# Altium PCB PCB1.PcbDoc
Units mil, origin at the board's own origin, x right, y up, seen from the top; angles counter-clockwise.
Board outline 2125 x 3375 mil, 4 copper layers (Top Layer, Layer 1, Layer 2, Bottom Layer), stack 60.63 mil thick; 22 components, 13 nets, 85 pads, 21 vias.
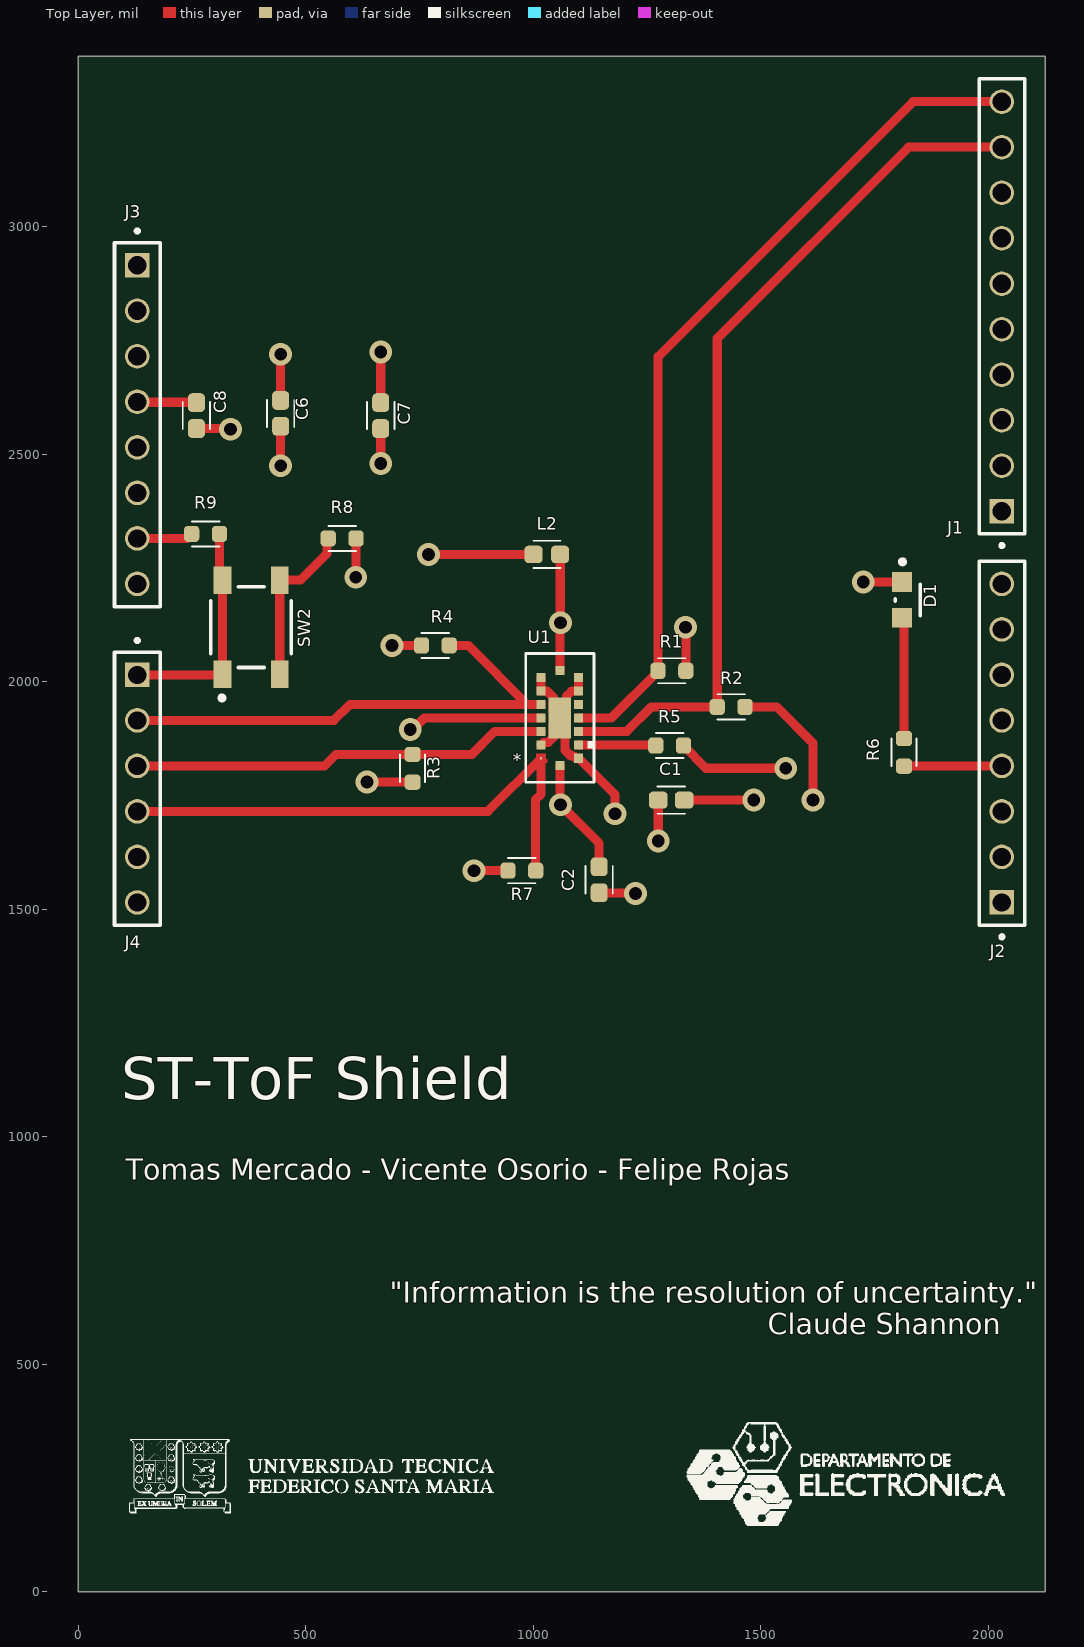
[diagram p0: Top Layer view]
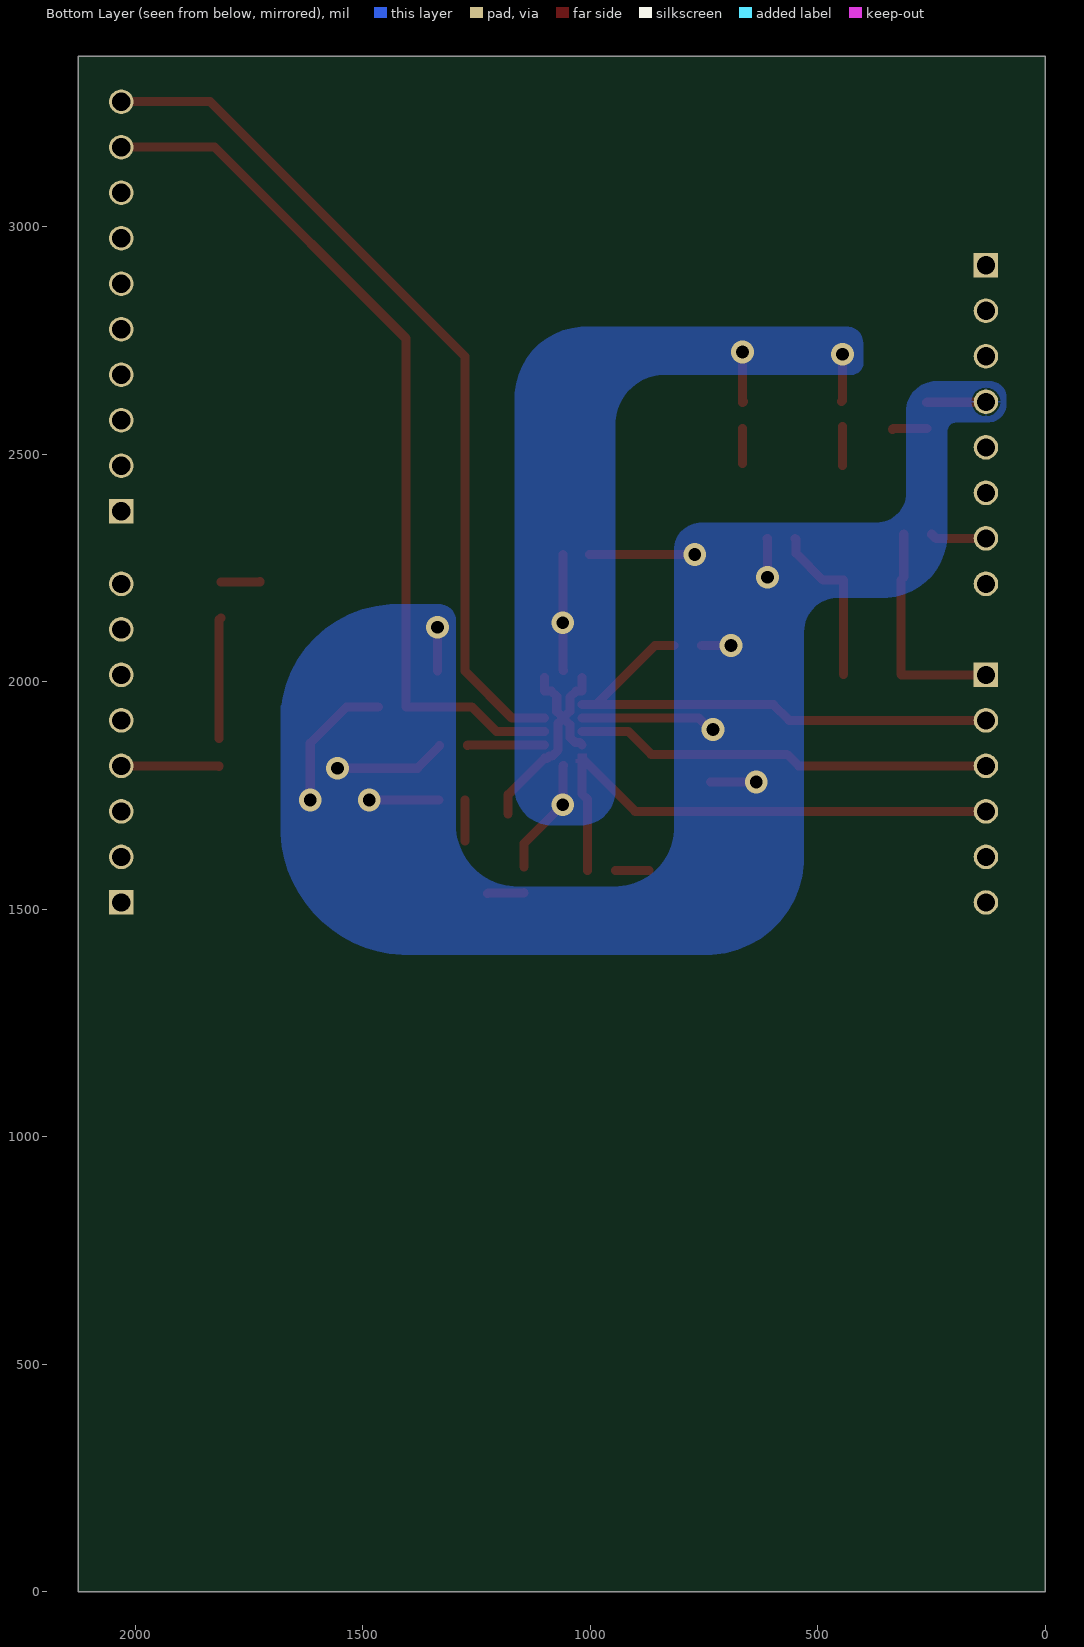
[diagram p1: Bottom Layer view, seen from below]
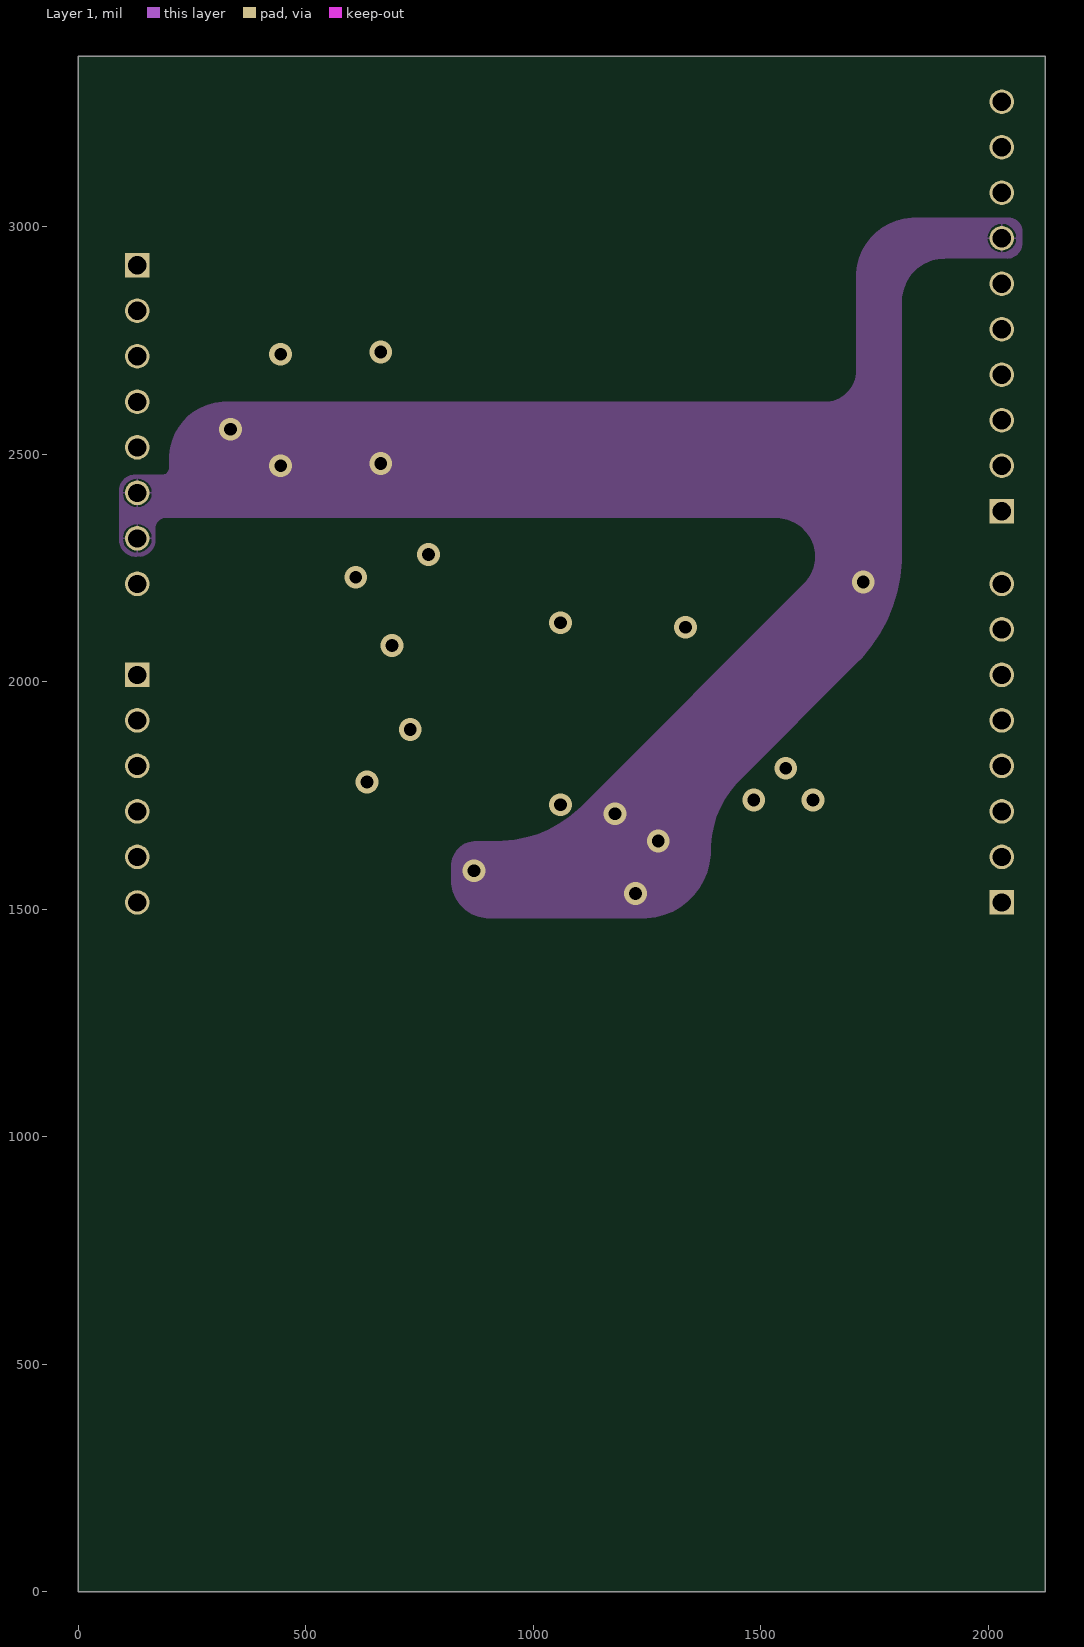
[diagram p2: Layer 1]
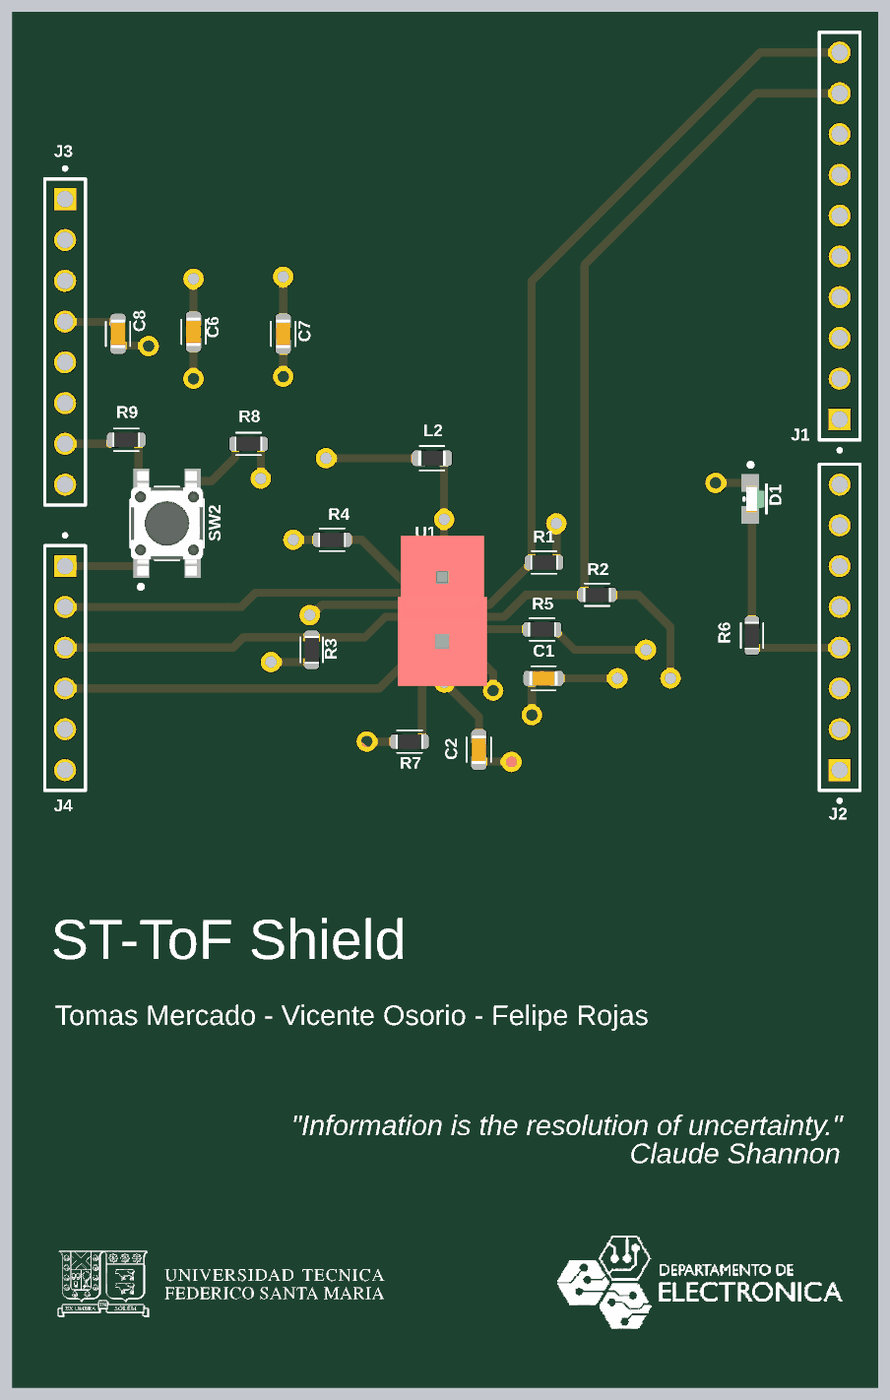
[diagram p3: 3D render of the assembled board from above, using the file's embedded part models]

## Layer stack, top to bottom
Top Solder: solder mask 0.4, Solder Resist, Dk 3.5
Top Layer: signal copper 1.378
Dielectric 2: prepreg 7.874, PP-006, Dk 4.2
Layer 1: signal copper 1.378
Dielectric 1: dielectric 39.37, FR-4, Dk 4.2
Layer 2: signal copper 1.378
Dielectric 3: prepreg 7.874, PP-006, Dk 4.2
Bottom Layer: signal copper 1.378
Bottom Solder: solder mask 0.4, Solder Resist, Dk 3.5

## Board outline
0,0 2125,0 2125,3375 0,3375

## Design rules (kind name [scope] priority, off if disabled: settings)
BoardOutlineClearance [All] p1: gap=7.87 ignorepadtopadclearanceinfootprint=FALSE
Clearance [All] p1: gap=4 ignorepadtopadclearanceinfootprint=TRUE except(5: Arc-Via Track-Via SMDPad-Via THPad-Via Via-Via Via-Fill Via-Poly Via-Region Via-Text; 10: Arc-Hole Track-Hole SMDPad-Hole THPad-Hole Via-Hole Fill-Hole Poly-Hole Region-Hole Text-Hole)
ComponentClearance [All] p1: gap=4 collisioncheckmode=3 verticalgap=4 showdistances=TRUE
DiffPairsRouting [All] p1: maxlimit=4 minlimit=4 mostfreqgap=4 toplayer_minwidth=4 toplayer_maxwidth=71497.94 toplayer_prefwidth=4 midlayer1_minwidth=4 midlayer1_maxwidth=71497.94 midlayer1_prefwidth=4 midlayer2_minwidth=4 midlayer2_maxwidth=71497.94 midlayer2_prefwidth=4 bottomlayer_minwidth=4 bottomlayer_maxwidth=71497.94 bottomlayer_prefwidth=4 maxuncoupledlength=500
Height [All] p1: minheight=0 maxheight=71497.94 prefheight=500
HoleSize [All] p1: absolutevalues=TRUE maxlimit=248.03 minlimit=7.87 maxpercent=80.000 minpercent=20.000
HoleToHoleClearance [All] p1: gap=10 allowstackedmicrovias=FALSE
MinimumAnnularRing [All] p1: minimumring=6
MinimumSolderMaskSliver [All] p1: minsoldermaskwidth=6
PlaneClearance [All] p1: clearance=4
PlaneConnect PlaneConnectPowerPads [InPadClass('PowerPads')] p1: planeconnectstyle=Direct reliefexpansion=20 reliefentries=4 reliefconductorwidth=10 reliefairgap=10
PlaneConnect [All] p2: pad.planeconnectstyle=Relief pad.reliefexpansion=11.81 pad.reliefentries=4 pad.reliefconductorwidth=4 pad.reliefairgap=4 via.planeconnectstyle=Direct via.reliefexpansion=11.81 via.reliefentries=4 via.reliefconductorwidth=5 via.reliefairgap=5
PolygonConnect PolygonConnectPowerPads [All vs (InPadClass('PowerPads'))] p1: connectstyle=Direct reliefconductorwidth=10 reliefentries=4 polygonreliefangle="90 Angle" airgapwidth=10
PolygonConnect [All] p2: thpad.connectstyle=Relief thpad.reliefconductorwidth=4 thpad.reliefentries=4 thpad.polygonreliefangle="90 Angle" thpad.airgapwidth=4 smdpad.connectstyle=Relief smdpad.reliefconductorwidth=4 smdpad.reliefentries=4 smdpad.polygonreliefangle="90 Angle" smdpad.airgapwidth=4 via.connectstyle=Direct via.reliefconductorwidth=5 via.reliefentries=4 via.polygonreliefangle="90 Angle" via.airgapwidth=5
RoutingVias [All] p1: holewidth=7.87 width=17.72 viastyle="Through Hole" minholewidth=7.87 minwidth=17.72 maxholewidth=248.03 maxwidth=257.87
SilkToSilkClearance [All] p1: silktosilkclearance=5
SilkToSolderMaskClearance [IsPad] p1: minsilkscreentomaskgap=5 clearancetoexposedcopper=TRUE
SolderMaskExpansion [All] p1: expansion=2 istentingtop=FALSE
UnRoutedNet [All] p1: checkbadconnections=TRUE
Width Power_20mil [All] p1: maxlimit=1000 minlimit=20 preferedwidth=20 minimp=50.000000 maximp=50.000000 favimp=50.000000
Width Power_12mil [All] p2: maxlimit=1000 minlimit=12 preferedwidth=12 minimp=50.000000 maximp=50.000000 favimp=50.000000
Width Width_10mil [All] p3: maxlimit=1000 minlimit=10 preferedwidth=10 minimp=50.000000 maximp=50.000000 favimp=50.000000
Width Width_6mil [All] p4: maxlimit=1000 minlimit=6 preferedwidth=6 minimp=50.000000 maximp=50.000000 favimp=50.000000
Width Width_4mil [All] p5: maxlimit=1000 minlimit=4 preferedwidth=4 minimp=50.000000 maximp=50.000000 favimp=50.000000
19 further rules are at their usual default settings.

## Components (designator, comment, footprint, x,y, rotation, side; value= is the part's Value field where it differs from the comment)
C1 "100nF" "C0603 - MURATA" 1303.54,1740 r0 top
C2 "4.7µF" "C0603 - MURATA" 1145,1565 r90 top
C6 "4.7µF" "C0603 - MURATA" 445,2590 r90 top
C7 "100nF" "C0603 - MURATA" 665,2585 r90 top
C8 "100nF" "C0603 - MURATA" 260,2585 r90 top
D1 "LTST-S270KGKT" FP-LTST-S270KGKT-MFG 1820,2180 r270 top
J1 "TSW-110-14-G-S-LL" SAMTEC_TSW-110-14-G-S-LL 2030,2375 r90 top locked
J2 "TSW-108-14-G-S-LL" SAMTEC_TSW-108-14-G-S-LL 2030,1515.16 r90 top locked
J3 "TSW-108-14-G-S-LL" SAMTEC_TSW-108-14-G-S-LL 130,2915.16 r270 top locked (schematic designator J5)
J4 "TSW-106-14-G-S-LL" SAMTEC_TSW-106-14-G-S-LL 130,2015.16 r270 top locked (schematic designator J6)
L2 "BLM18KG121TZ1D" BLM18KG121TZ1D 1030,2280 r0 top
R1 "2.2kΩ" "R0603 - YAGEO" 1305,2024.33 r0 top
R2 "2.2kΩ" "R0603 - YAGEO" 1435,1945 r0 top
R3 "47kΩ" "R0603 - YAGEO" 735,1810 r270 top
R4 "47kΩ" "R0603 - YAGEO" 785,2080 r180 top
R5 "47kΩ" "R0603 - YAGEO" 1300,1860 r0 top
R6 "270Ω" "R0603 - YAGEO" 1815,1845 r270 top
R7 "47kΩ" "R0603 - YAGEO" 975,1585 r0 top
R8 "10Ω" "R0603 - YAGEO" 580,2315 r180 top
R9 "10kΩ" "R0603 - YAGEO" 280,2325 r0 top
SW2 "PTS647SK38SMTR2LFS" FP-PTS647SK38SMTR2LFS-MFG 380,2120 r90 top
U1 "VL53L7CXV0GC/1" VL53L7CXV0GC1 1058.66,1920.47 r0 top

## Footprints (in the part's own frame and the unit in brackets; to place one, negate y for a bottom-side part, rotate by r counter-clockwise, add the part's x,y. Pads: shape width x height; smd on the part's side, far side on the other; paste and mask are expansions set on the pad)
BLM18KG121TZ1D [mm] "Chip Inductor, 2-Leads, Body 1,60x0,80mm, IPC Medium Density"
  rrect50% 1.02x0.98 smd: 1(-0.74,0) 2(0.74,0)
  silkscreen extent -0.76,-0.76 0.76,0.76, body extent -0.87,-0.48 0.87,0.48, height 0.75
"C0603 - MURATA" [mm]
  rrect50% 1.05x0.95 smd: 1(-0.725,0) 2(0.725,0)
  silkscreen extent -0.76,-0.76 0.76,0.76, body extent -0.9,-0.45 0.9,0.45, height 0.9
FP-LTST-S270KGKT-MFG [mm]
  rect 1.1x1.1 smd paste+0 mask+0: 1(-1,-0.235) 2(1,-0.235)
  silkscreen extent -2.25,-0.63 0.87,0.77, body extent -1.65,-0.88 1.65,0.72, height 0.25
FP-PTS647SK38SMTR2LFS-MFG [mm]
  rect 1.55x1 smd paste+0 mask+0: 1(-2.625,1.6) 2(2.625,1.6) 3(-2.625,-1.6) 4(2.625,-1.6)
  silkscreen extent -4.07,-2.25 2.25,2.25, body extent -3.5,-2.35 3.5,2.35, height 0.25
"R0603 - YAGEO" [mm]
  rrect50% 0.85x0.9 smd: 1(-0.775,0) 2(0.775,0)
  silkscreen extent -0.77,-0.7 0.77,0.7, body extent -0.85,-0.45 0.85,0.45, height 0.55
SAMTEC_TSW-106-14-G-S-LL [mm]
  rect 1.37x1.37 hole 1.02: 01(0,0)
  round 1.37 hole 1.02: 02(2.54,0) 03(5.08,0) 04(7.62,0) 05(10.16,0) 06(12.7,0)
  silkscreen extent -2.02,-1.27 13.97,1.27
SAMTEC_TSW-108-14-G-S-LL [mm]
  rect 1.37x1.37 hole 1.02: 01(0,0)
  round 1.37 hole 1.02: 02(2.54,0) 03(5.08,0) 04(7.62,0) 05(10.16,0) 06(12.7,0) 07(15.24,0) 08(17.78,0)
  silkscreen extent -2.02,-1.27 19.05,1.27
SAMTEC_TSW-110-14-G-S-LL [mm]
  rect 1.37x1.37 hole 1.02: 01(0,0)
  round 1.37 hole 1.02: 02(2.54,0) 03(5.08,0) 04(7.62,0) 05(10.16,0) 06(12.7,0) 07(15.24,0) 08(17.78,0) 09(20.32,0) 10(22.86,0)
  silkscreen extent -2.02,-1.27 24.13,1.27
VL53L7CXV0GC1 [mil]
  rect 5x5 smd paste-2.5 mask-2.5: A1(-41.34,-88.58)
  rect 20x20 smd paste+0 mask+0: A2(-41.34,-59.06) A3(-41.34,-29.53) A4(-41.34,0) A5(-41.34,29.53) A6(-41.34,59.06) A7(-41.34,88.58) B1(0,-104.33) B7(0,104.33) C1(41.34,-88.58) C2(41.34,-59.06) C3(41.34,-29.53) C4(41.34,0) C5(41.34,29.53) C6(41.34,59.06) C7(41.34,88.58)
  rect 49x91 smd paste-45.5 mask-45.5: B4(0,0)
  Top Layer region: -31.34,-78.58 -51.34,-78.58 -51.34,-98.58 -27.34,-98.58 -27.34,-90.58 -31.34,-90.58
  silkscreen extent -75,-142 75,142, body extent -113,-199 106,170, height 179

## Part data
C1 C7 C8: library part "CAP - GENERIC", "Ceramic Capacitor, Ceramic, 16V, 10% +Tol, 10% -Tol, X7R, 15% TC, 0.1uF, Surface Mount, 0603", .Case/Package=0603, .Voltage Rating (DC)=16V, Case Code (Metric)=1608, Dielectric=X7R, Dielectric Material=Ceramic, Manufacturer=Murata, Manufacturer Lifecycle Status="IN PRODUCTION", Manufacturer Part Number=GCJ188R71C104KA01D, Max Operating Temperature=125°C, Min Operating Temperature=-55°C, Ratings=AEC-Q200, Supplier Part Number 1=81-GCJ188R71C104KA1D, Tolerance=10%, Capacitance=100nF, Case Code (Imperial)=0603, Case/Package=0603, Category="Ceramic Capacitors", ComponentLink1Description=https://datasheet.octopart.com:443/GCJ188R71C104KA01D-Murata-datasheet-141264586.pdf?src-supplier=Geoflip, ComponentLink1URL=https://datasheet.octopart.com:443/GCJ188R71C104KA01D-Murata-datasheet-141264586.pdf?src-supplier=Geoflip, ComponentLink2Description=https://datasheet.octopart.com:443/GCJ188R71C104KA01D-Murata-datasheet-140654670.pdf?src-supplier=Ciiva, ComponentLink2URL=https://datasheet.octopart.com:443/GCJ188R71C104KA01D-Murata-datasheet-140654670.pdf?src-supplier=Ciiva, ComponentLink3Description=https://datasheet.octopart.com:443/GCJ188R71C104KA01D-Murata-datasheet-138714343.pdf?src-supplier=Ciiva, ComponentLink3URL=https://datasheet.octopart.com:443/GCJ188R71C104KA01D-Murata-datasheet-138714343.pdf?src-supplier=Ciiva, ComponentLink4Description=https://datasheet.octopart.com:443/GCJ188R71C104KA01D-Murata-datasheet-165611796.pdf?src-supplier=TME, ComponentLink4URL=https://datasheet.octopart.com:443/GCJ188R71C104KA01D-Murata-datasheet-165611796.pdf?src-supplier=TME, ComponentLink5Description=https://datasheet.octopart.com:443/GCJ188R71C104KA01D-Murata-datasheet-118179445.pdf?src-supplier=LCSC, ComponentLink5URL=https://datasheet.octopart.com:443/GCJ188R71C104KA01D-Murata-datasheet-118179445.pdf?src-supplier=LCSC, ComponentLink6Description=https://datasheet.octopart.com/GCJ188R71C104KA01D-Murata-datasheet-14405600.pdf, ComponentLink6URL=https://datasheet.octopart.com/GCJ188R71C104KA01D-Murata-datasheet-14405600.pdf, ComponentLink7Description=http://sigma.octopart.com:80/reach_statement/Murata-company-16.pdf?src-supplier=Compliance+Statements, ComponentLink7URL=http://sigma.octopart.com:80/reach_statement/Murata-company-16.pdf?src-supplier=Compliance+Statements, Depth=800µm, Features="Soft Termination", Height=800µm, Length=1.6mm, Lifecycle Status=Production, Material=Ceramic, Mount="Surface Mount", Number of Terminals=2, Pricing 1="1=0,16, 10=0,065, 50=0,065, 100=0,054, 1000=0,039, 10000=0,022 (USD)", Radiation Hardening=No, REACH SVHC=Yes, RoHS=Compliant, Schedule B="8532240020, 8532240020|8532240020|8532240020|8532240020|8532240020|8532240020|8532240020|8532240020|8532240020|8532240020|8532240020|8532240020|8532240020|8532240020|8532240020|8532240020|8532240020|8532240020|8532240020|8532240020|8532240020|8532240020|8532240020|85", Stock 1=83275, Supplier 1=Mouser, Termination=SMD/SMT, Voltage Rating=16V, Voltage Rating (DC)=16V, Width=800µm
C2 C6: library part "CAP - GENERIC", "GRJ Series 0603 6.3 V 4.7 uF ±10% X7S SMT Multilayer Ceramic Capacitor", .Case/Package=0603, .Voltage Rating (DC)=6.3V, Case Code (Metric)=1608, Dielectric=X7S, Dielectric Material=Ceramic, Manufacturer=Murata, Manufacturer Lifecycle Status="IN PRODUCTION", Manufacturer Part Number=GRJ188C70J475KE11D, Max Operating Temperature=125°C, Min Operating Temperature=-55°C, Supplier Part Number 1=81-GRJ188C70J475KE1D, Tolerance=10%, Capacitance=4.7µF, Case Code (Imperial)=0603, Case/Package=0603, Category="Ceramic Capacitors", ComponentLink1Description=https://datasheet.octopart.com:443/GRJ188C70J475KE11D-Murata-datasheet-165579666.pdf?src-supplier=TME, ComponentLink1URL=https://datasheet.octopart.com:443/GRJ188C70J475KE11D-Murata-datasheet-165579666.pdf?src-supplier=TME, ComponentLink2Description=https://datasheet.octopart.com:443/GRJ188C70J475KE11D-Murata-datasheet-140671071.pdf?src-supplier=Ciiva, ComponentLink2URL=https://datasheet.octopart.com:443/GRJ188C70J475KE11D-Murata-datasheet-140671071.pdf?src-supplier=Ciiva, ComponentLink3Description=https://datasheet.octopart.com:443/GRJ188C70J475KE11D-Murata-datasheet-140671041.pdf?src-supplier=Ciiva, ComponentLink3URL=https://datasheet.octopart.com:443/GRJ188C70J475KE11D-Murata-datasheet-140671041.pdf?src-supplier=Ciiva, ComponentLink4Description=https://datasheet.octopart.com:443/GRJ188C70J475KE11D-Murata-datasheet-138730632.pdf?src-supplier=Ciiva, ComponentLink4URL=https://datasheet.octopart.com:443/GRJ188C70J475KE11D-Murata-datasheet-138730632.pdf?src-supplier=Ciiva, ComponentLink5Description=https://datasheet.octopart.com:443/GRJ188C70J475KE11D-Murata-datasheet-82944415.pdf?src-supplier=Future+Electronics, ComponentLink5URL=https://datasheet.octopart.com:443/GRJ188C70J475KE11D-Murata-datasheet-82944415.pdf?src-supplier=Future+Electronics, ComponentLink6Description=https://datasheet.octopart.com/GRJ188C70J475KE11D-Murata-datasheet-12515295.pdf, ComponentLink6URL=https://datasheet.octopart.com/GRJ188C70J475KE11D-Murata-datasheet-12515295.pdf, ComponentLink7Description=https://datasheet.octopart.com/GRJ188C70J475KE11D-Murata-datasheet-12510076.pdf, ComponentLink7URL=https://datasheet.octopart.com/GRJ188C70J475KE11D-Murata-datasheet-12510076.pdf, ComponentLink8Description=https://datasheet.octopart.com/GRJ188C70J475KE11D-Murata-datasheet-11978611.pdf, ComponentLink8URL=https://datasheet.octopart.com/GRJ188C70J475KE11D-Murata-datasheet-11978611.pdf, ComponentLink9Description=https://datasheet.octopart.com/GRJ188C70J475KE11D-Murata-datasheet-10025737.pdf, ComponentLink9URL=https://datasheet.octopart.com/GRJ188C70J475KE11D-Murata-datasheet-10025737.pdf, ComponentLink10Description=https://datasheet.octopart.com/GRJ188C70J475KE11D-Murata-datasheet-8819587.pdf, ComponentLink10URL=https://datasheet.octopart.com/GRJ188C70J475KE11D-Murata-datasheet-8819587.pdf, ComponentLink11Description=https://datasheet.octopart.com:443/GRJ188C70J475KE11D-Murata-datasheet-142295902.pdf?src-supplier=Arrow.cn, ComponentLink11URL=https://datasheet.octopart.com:443/GRJ188C70J475KE11D-Murata-datasheet-142295902.pdf?src-supplier=Arrow.cn, ComponentLink12Description=http://sigma.octopart.com:80/reach_statement/Murata-company-16.pdf?src-supplier=Compliance+Statements, ComponentLink12URL=http://sigma.octopart.com:80/reach_statement/Murata-company-16.pdf?src-supplier=Compliance+Statements, Features="Soft Termination", Height=800µm, Length=1.6mm, Lifecycle Status=Production, Mount="Surface Mount", Number of Terminals=2, Pricing 1="1=0,23, 10=0,096, 50=0,096, 100=0,073, 1000=0,054, 10000=0,042 (USD)", REACH SVHC=Yes, RoHS=Compliant, Schedule B="8532240020, 8532240020|8532240020, 8532240020|8532240020|8532240020, 8532240020|8532240020|8532240020|8532240020", Stock 1=17220, Supplier 1=Mouser, Thickness=800µm, Voltage Rating=6.3V, Voltage Rating (DC)=6.3V, Width=800µm
D1: library part CMP-2000-06629-2, "LED GREEN CLEAR CHIP SMD R/A", Case Code (Imperial)=0603, Case Code (Metric)=1608, Color=Green, Forward Current=30mA, Forward Voltage=2V, Lens Color=Colorless, Max Operating Temperature=85°C, Min Operating Temperature=-55°C, Package Quantity=1, Power Dissipation=75mW, Reverse Voltage=5V, Test Current=20mA, Case/Package=0603, Depth=0.6mm, Dominant Wavelength=571nm, Height=0.6mm, Illumination Color=Green, Lead Free="Lead Free", Length=1.6mm, Lens Style=Diffused, Lens Transparency=Clear, Luminous Intensity=71mcd, Mount="Surface Mount", Number of Elements=1, Number of LEDs=1, Number of Pins=2, Packaging="Tape and Reel", Power Rating=75mW, Radiation Hardening=No, Viewing Angle=130°, Wavelength=574nm, Width=1.15mm
J1 J2 J3 J4: Package=None, Availability=Unavailable, Price=None
  J1: MP=TSW-110-14-G-S-LL
  J2 J3: MP=TSW-108-14-G-S-LL
  J4: MP=TSW-106-14-G-S-LL
L2: library part INDUCTOR_BLM18KG121TZ1D, "Ferrite Beads Multi-Layer Power 120Ohm 25% 100MHz 3A 0.03Ohm DCR 0603 T/R Automotive AEC-Q200", .Max DC Current='', .RMS Current (Irms)=3A, .Value=120Ω, Case/Package=0603, Current Rating=1.9A, DC Resistance (DCR)=30mΩ, Manufacturer=Murata, Max Operating Temperature=125°C, Min Operating Temperature=-55°C, Supplier Part Number 1=81-BLM18KG121TZ1D, Test Frequency=100MHz, Tolerance=25%, Category="Ferrite Beads and Chips", ComponentLink1Description=https://datasheet.octopart.com:443/BLM18KG121TZ1D-Murata-datasheet-180806584.pdf?src-supplier=IHS, ComponentLink1URL=https://datasheet.octopart.com:443/BLM18KG121TZ1D-Murata-datasheet-180806584.pdf?src-supplier=IHS, ComponentLink2Description=https://datasheet.octopart.com:443/BLM18KG121TZ1D-Murata-datasheet-141273646.pdf?src-supplier=element14+APAC, ComponentLink2URL=https://datasheet.octopart.com:443/BLM18KG121TZ1D-Murata-datasheet-141273646.pdf?src-supplier=element14+APAC, ComponentLink3Description=https://datasheet.octopart.com:443/BLM18KG121TZ1D-Murata-datasheet-166171476.pdf?src-supplier=TME, ComponentLink3URL=https://datasheet.octopart.com:443/BLM18KG121TZ1D-Murata-datasheet-166171476.pdf?src-supplier=TME, ComponentLink4Description=https://datasheet.octopart.com:443/BLM18KG121TZ1D-Murata-datasheet-138707099.pdf?src-supplier=Ciiva, ComponentLink4URL=https://datasheet.octopart.com:443/BLM18KG121TZ1D-Murata-datasheet-138707099.pdf?src-supplier=Ciiva, ComponentLink5Description=http://sigma.octopart.com:80/reach_statement/Murata-company-16.pdf?src-supplier=Compliance+Statements, ComponentLink5URL=http://sigma.octopart.com:80/reach_statement/Murata-company-16.pdf?src-supplier=Compliance+Statements, Contact Plating=Tin, Core Material=Ferrite, Height=600µm, Impedance=120Ω, Length=1.6mm, Lifecycle Status=Production, Manufacturer Part Number=BLM18KG121TZ1D, Number of Circuits=1, Number of Terminals=2, Pricing 1="1=0,1, 10=0,064, 50=0,05, 100=0,045, 1000=0,027, 10000=0,02 (USD)", REACH SVHC=Yes, Resistance=30mΩ, RMS Current (Irms)=3A, RoHS=Compliant, Schedule B="8504500000, 8504500000|8504500000|8504500000|8504500000|8504500000", Series Resistance=30mΩ, Stock 1=36755, Supplier 1=Mouser, Width=800µm
R1 R2: library part "RESISTOR - GENERIC", "Surge Chip Resistor Automotive Grade Thick Film 0603 2.2kOhm 1% Paper T/R", .Case/Package=0603, .Tolerance=1%, Manufacturer="Yageo Group", Manufacturer Part Number=SR0603FR-7T2K2L, Max Operating Temperature=155°C, Min Operating Temperature=-55°C, Power Dissipation=250mW, Supplier Part Number 1=603-SR0603FR-7T2K2L, Temperature Coefficient=100ppm/°C, Voltage Rating=75V, Working Voltage=150V, Case/Package=0603, Category="Chip SMD Resistors", China RoHS=Non-Compliant, ComponentLink1Description=https://datasheet.octopart.com:443/SR0603FR-7T2K2L-Yageo-datasheet-176402240.pdf?src-supplier=element14+APAC, ComponentLink1URL=https://datasheet.octopart.com:443/SR0603FR-7T2K2L-Yageo-datasheet-176402240.pdf?src-supplier=element14+APAC, ComponentLink2Description=https://datasheet.octopart.com:443/SR0603FR-7T2K2L-Yageo-datasheet-119732217.pdf?src-supplier=Upverter, ComponentLink2URL=https://datasheet.octopart.com:443/SR0603FR-7T2K2L-Yageo-datasheet-119732217.pdf?src-supplier=Upverter, ComponentLink3Description=https://datasheet.octopart.com:443/SR0603FR-7T2K2L-Yageo-datasheet-155675517.pdf?src-supplier=ODG+(Origin+Data+Global), ComponentLink3URL=https://datasheet.octopart.com:443/SR0603FR-7T2K2L-Yageo-datasheet-155675517.pdf?src-supplier=ODG+(Origin+Data+Global), ComponentLink4Description=https://datasheet.octopart.com:443/SR0603FR-7T2K2L-Yageo-datasheet-137701088.pdf?src-supplier=Future+Electronics, ComponentLink4URL=https://datasheet.octopart.com:443/SR0603FR-7T2K2L-Yageo-datasheet-137701088.pdf?src-supplier=Future+Electronics, ComponentLink5Description=https://datasheet.octopart.com/SR0603FR-7T2K2L-Yageo-datasheet-11047080.pdf, ComponentLink5URL=https://datasheet.octopart.com/SR0603FR-7T2K2L-Yageo-datasheet-11047080.pdf, ComponentLink6Description=http://sigma.octopart.com:80/rohs_statement/Yageo-company-2.pdf?src-supplier=Compliance+Statements, ComponentLink6URL=http://sigma.octopart.com:80/rohs_statement/Yageo-company-2.pdf?src-supplier=Compliance+Statements, ComponentLink7Description=http://sigma.octopart.com:80/conflict_mineral_statement/Yageo-company-3.pdf?src-supplier=Compliance+Statements, ComponentLink7URL=http://sigma.octopart.com:80/conflict_mineral_statement/Yageo-company-3.pdf?src-supplier=Compliance+Statements, Composition="Thick Film", Height=450µm, Lifecycle Status=Production, Mount="Surface Mount", Number of Terminals=2, Packaging="Tape & Reel", Power Rating=250mW, Pricing 1="1=0,55, 10=0,321, 50=0,296, 100=0,265, 1000=0,176, 10000=0,158 (USD)", REACH SVHC=Yes, Resistance=2.2kΩ, RoHS=Compliant, Stock 1=5934, Supplier 1=Mouser, Tolerance=1%, Width=800µm
R3 R4 R5 R7: library part "RESISTOR - GENERIC", "Fixed Resistor, Metal Glaze/thick Film, 0.2W, 47000ohm, 75V, 1% +/-Tol, 100ppm/Cel, Surface Mount, 0603", .Case/Package=0603, .Tolerance=1%, Manufacturer="Yageo Group", Manufacturer Part Number=AC0603FR-7W47KL, Max Operating Temperature=155°C, Min Operating Temperature=-55°C, Power Dissipation=200mW, Supplier Part Number 1=603-AC0603FR-7W47KL, Temperature Coefficient=100ppm/°C, Voltage Rating=75V, Case/Package=0603, Category="Chip SMD Resistors", China RoHS=Non-Compliant, ComponentLink1Description=https://datasheet.octopart.com:443/AC0603FR-7W47KL-Yageo-datasheet-182189377.pdf?src-supplier=IHS, ComponentLink1URL=https://datasheet.octopart.com:443/AC0603FR-7W47KL-Yageo-datasheet-182189377.pdf?src-supplier=IHS, ComponentLink2Description=https://datasheet.octopart.com:443/AC0603FR-7W47KL-Yageo-datasheet-86786639.pdf?src-supplier=Upverter, ComponentLink2URL=https://datasheet.octopart.com:443/AC0603FR-7W47KL-Yageo-datasheet-86786639.pdf?src-supplier=Upverter, ComponentLink3Description=https://datasheet.octopart.com/AC0603FR-7W47KL-Yageo-datasheet-12512238.pdf, ComponentLink3URL=https://datasheet.octopart.com/AC0603FR-7W47KL-Yageo-datasheet-12512238.pdf, ComponentLink4Description=http://sigma.octopart.com:80/rohs_statement/Yageo-company-2.pdf?src-supplier=Compliance+Statements, ComponentLink4URL=http://sigma.octopart.com:80/rohs_statement/Yageo-company-2.pdf?src-supplier=Compliance+Statements, ComponentLink5Description=http://sigma.octopart.com:80/conflict_mineral_statement/Yageo-company-3.pdf?src-supplier=Compliance+Statements, ComponentLink5URL=http://sigma.octopart.com:80/conflict_mineral_statement/Yageo-company-3.pdf?src-supplier=Compliance+Statements, Composition="Thick Film", Height=450µm, Lifecycle Status=Production, Mount="Surface Mount", Number of Terminals=2, Packaging="Tape & Reel", Power Rating=200mW, Pricing 1="1=0,16, 10=0,016, 50=0,016, 100=0,013, 1000=0,013, 10000=0,009 (USD)", REACH SVHC=Yes, Resistance=47kΩ, RoHS=Compliant, Stock 1=63636, Supplier 1=Mouser, Tolerance=1%, Width=800µm, Working Voltage=75V
R6: library part "RESISTOR - GENERIC", "Res Thick Film 0603 270 Ohm 5% 0.1W(1/10W) ±100ppm/C Pad SMD Automotive T/R", .Case/Package=0603, .Tolerance=1%, Case Code (Metric)=1608, Manufacturer="Yageo Group", Manufacturer Part Number=AC0603JR-7W68RL, Max Operating Temperature=155°C, Max Power Dissipation=100mW, Min Operating Temperature=-55°C, Power Dissipation=200mW, Supplier Part Number=603-AC0603JR-07270RL, Temperature Coefficient=100ppm/°C, Voltage Rating=75V, Case Code (Imperial)=0603, Case/Package=0603, Category="Chip SMD Resistors", China RoHS=Non-Compliant, ComponentLink1Description=https://datasheet.octopart.com:443/AC0603JR-7W68RL-Yageo-datasheet-182189377.pdf?src-supplier=IHS, ComponentLink1URL=https://datasheet.octopart.com:443/AC0603JR-7W68RL-Yageo-datasheet-182189377.pdf?src-supplier=IHS, ComponentLink2Description=https://datasheet.octopart.com:443/AC0603JR-7W68RL-Yageo-datasheet-86786639.pdf?src-supplier=Upverter, ComponentLink2URL=https://datasheet.octopart.com:443/AC0603JR-7W68RL-Yageo-datasheet-86786639.pdf?src-supplier=Upverter, ComponentLink3Description=https://datasheet.octopart.com/AC0603JR-7W68RL-Yageo-datasheet-12512238.pdf, ComponentLink3URL=https://datasheet.octopart.com/AC0603JR-7W68RL-Yageo-datasheet-12512238.pdf, ComponentLink4Description=http://sigma.octopart.com:80/rohs_statement/Yageo-company-2.pdf?src-supplier=Compliance+Statements, ComponentLink4URL=http://sigma.octopart.com:80/rohs_statement/Yageo-company-2.pdf?src-supplier=Compliance+Statements, ComponentLink5Description=http://sigma.octopart.com:80/conflict_mineral_statement/Yageo-company-3.pdf?src-supplier=Compliance+Statements, ComponentLink5URL=http://sigma.octopart.com:80/conflict_mineral_statement/Yageo-company-3.pdf?src-supplier=Compliance+Statements, ComponentLink6Description=https://datasheet.octopart.com:443/AC0603JR-7W68RL-Yageo-datasheet-182189377.pdf?src-supplier=IHS, ComponentLink6URL=https://datasheet.octopart.com:443/AC0603JR-7W68RL-Yageo-datasheet-182189377.pdf?src-supplier=IHS, ComponentLink7Description=https://datasheet.octopart.com:443/AC0603JR-7W68RL-Yageo-datasheet-86786639.pdf?src-supplier=Upverter, ComponentLink7URL=https://datasheet.octopart.com:443/AC0603JR-7W68RL-Yageo-datasheet-86786639.pdf?src-supplier=Upverter, ComponentLink8Description=https://datasheet.octopart.com/AC0603JR-7W68RL-Yageo-datasheet-12512238.pdf, ComponentLink8URL=https://datasheet.octopart.com/AC0603JR-7W68RL-Yageo-datasheet-12512238.pdf, ComponentLink9Description=https://datasheet.octopart.com:443/AC0603FR-7W10RL-Yageo-datasheet-182189377.pdf?src-supplier=IHS, ComponentLink9URL=https://datasheet.octopart.com:443/AC0603FR-7W10RL-Yageo-datasheet-182189377.pdf?src-supplier=IHS, ComponentLink10Description=https://datasheet.octopart.com:443/AC0603FR-7W10RL-Yageo-datasheet-86786639.pdf?src-supplier=Upverter, ComponentLink10URL=https://datasheet.octopart.com:443/AC0603FR-7W10RL-Yageo-datasheet-86786639.pdf?src-supplier=Upverter, ComponentLink11Description=https://datasheet.octopart.com/AC0603FR-7W10RL-Yageo-datasheet-12512238.pdf, ComponentLink11URL=https://datasheet.octopart.com/AC0603FR-7W10RL-Yageo-datasheet-12512238.pdf, ComponentLink12Description=https://datasheet.octopart.com:443/AC0603JR-7W10KL-Yageo-datasheet-182189377.pdf?src-supplier=IHS, ComponentLink12URL=https://datasheet.octopart.com:443/AC0603JR-7W10KL-Yageo-datasheet-182189377.pdf?src-supplier=IHS, ComponentLink13Description=https://datasheet.octopart.com:443/AC0603JR-7W10KL-Yageo-datasheet-86786639.pdf?src-supplier=Upverter, ComponentLink13URL=https://datasheet.octopart.com:443/AC0603JR-7W10KL-Yageo-datasheet-86786639.pdf?src-supplier=Upverter, ComponentLink14Description=https://datasheet.octopart.com:443/AC0603JR-7W10KL-Yageo-datasheet-166720450.pdf?src-supplier=Future+Electronics, ComponentLink14URL=https://datasheet.octopart.com:443/AC0603JR-7W10KL-Yageo-datasheet-166720450.pdf?src-supplier=Future+Electronics, ComponentLink15Description=https://datasheet.octopart.com:443/AC0603JR-7W10KL-Yageo-datasheet-151884373.pdf?src-supplier=Future+Electronics, ComponentLink15URL=https://datasheet.octopart.com:443/AC0603JR-7W10KL-Yageo-datasheet-151884373.pdf?src-supplier=Future+Electronics, ComponentLink16Description=https://datasheet.octopart.com:443/AC0603JR-7W10KL-Yageo-datasheet-137699919.pdf?src-supplier=Future+Electronics, ComponentLink16URL=https://datasheet.octopart.com:443/AC0603JR-7W10KL-Yageo-datasheet-137699919.pdf?src-supplier=Future+Electronics, ComponentLink17Description=https://datasheet.octopart.com/AC0603JR-7W10KL-Yageo-datasheet-12512238.pdf, ComponentLink17URL=https://datasheet.octopart.com/AC0603JR-7W10KL-Yageo-datasheet-12512238.pdf, ComponentLink18Description=https://datasheet.octopart.com:443/AC0603JR-07270RL-Yageo-datasheet-182189377.pdf?src-supplier=IHS, ComponentLink18URL=https://datasheet.octopart.com:443/AC0603JR-07270RL-Yageo-datasheet-182189377.pdf?src-supplier=IHS, ComponentLink19Description=https://datasheet.octopart.com:443/AC0603JR-07270RL-Yageo-datasheet-86786639.pdf?src-supplier=Upverter, ComponentLink19URL=https://datasheet.octopart.com:443/AC0603JR-07270RL-Yageo-datasheet-86786639.pdf?src-supplier=Upverter, ComponentLink20Description=https://datasheet.octopart.com:443/AC0603JR-07270RL-Yageo-datasheet-178509465.pdf?src-supplier=Farnell, ComponentLink20URL=https://datasheet.octopart.com:443/AC0603JR-07270RL-Yageo-datasheet-178509465.pdf?src-supplier=Farnell, ComponentLink21Description=https://datasheet.octopart.com/AC0603JR-07270RL-Yageo-datasheet-12512238.pdf, ComponentLink21URL=https://datasheet.octopart.com/AC0603JR-07270RL-Yageo-datasheet-12512238.pdf, ComponentLink22Description=https://datasheet.octopart.com:443/AC0603JR-07270RL-Yageo-datasheet-166720450.pdf?src-supplier=Future+Electronics, ComponentLink22URL=https://datasheet.octopart.com:443/AC0603JR-07270RL-Yageo-datasheet-166720450.pdf?src-supplier=Future+Electronics, ComponentLink23Description=https://datasheet.octopart.com:443/AC0603JR-07270RL-Yageo-datasheet-151884373.pdf?src-supplier=Future+Electronics, ComponentLink23URL=https://datasheet.octopart.com:443/AC0603JR-07270RL-Yageo-datasheet-151884373.pdf?src-supplier=Future+Electronics, ComponentLink24Description=https://datasheet.octopart.com:443/AC0603JR-07270RL-Yageo-datasheet-137699919.pdf?src-supplier=Future+Electronics, ComponentLink24URL=https://datasheet.octopart.com:443/AC0603JR-07270RL-Yageo-datasheet-137699919.pdf?src-supplier=Future+Electronics, ComponentLink25Description=https://datasheet.octopart.com:443/AC0603JR-07270RL-Yageo-datasheet-24580492.pdf?src-supplier=Future+Electronics, ComponentLink25URL=https://datasheet.octopart.com:443/AC0603JR-07270RL-Yageo-datasheet-24580492.pdf?src-supplier=Future+Electronics, ComponentLink26Description=https://datasheet.octopart.com:443/AC0603JR-07270RL-Yageo-datasheet-128680206.pdf?src-supplier=X-ON, ComponentLink26URL=https://datasheet.octopart.com:443/AC0603JR-07270RL-Yageo-datasheet-128680206.pdf?src-supplier=X-ON, Composition="Thick Film", Features="Automotive AEC-Q200, Moisture Resistant", Height=450µm, Lead Free="Lead Free", Length=1.6002mm, Lifecycle Status=Production, Mount="Surface Mount", Mounting Technology="Surface Mount", Number of Terminals=2, Number of Terminations=2, Packaging="Tape & Reel", Power Rating=200mW, Pricing="5000=0,0055 (USD)", Pricing 1="1=0,16, 10=0,016, 50=0,016, 100=0,013, 1000=0,013, 10000=0,009 (USD)", REACH SVHC=Yes, Resistance=270Ω, RoHS=Compliant, Stock=26687, Stock 1=63636, Supplier=DigiKey, Supplier 1=Mouser, Termination=SMD/SMT, Tolerance=1%, Weight=2.012816mg, Width=800µm, Working Voltage=75V
R8: library part "RESISTOR - GENERIC", "Fixed Resistor, Metal Glaze/thick Film, 0.2W, 10ohm, 75V, 1% +/-Tol, 100ppm/Cel, Surface Mount, 0603", .Case/Package=0603, .Tolerance=1%, Manufacturer="Yageo Group", Manufacturer Part Number=AC0603JR-7W68RL, Max Operating Temperature=155°C, Min Operating Temperature=-55°C, Power Dissipation=200mW, Supplier Part Number=603-AC0603FR-7W10RL, Temperature Coefficient=100ppm/°C, Voltage Rating=75V, Case/Package=0603, Category="Chip SMD Resistors", China RoHS=Non-Compliant, ComponentLink1Description=https://datasheet.octopart.com:443/AC0603JR-7W68RL-Yageo-datasheet-182189377.pdf?src-supplier=IHS, ComponentLink1URL=https://datasheet.octopart.com:443/AC0603JR-7W68RL-Yageo-datasheet-182189377.pdf?src-supplier=IHS, ComponentLink2Description=https://datasheet.octopart.com:443/AC0603JR-7W68RL-Yageo-datasheet-86786639.pdf?src-supplier=Upverter, ComponentLink2URL=https://datasheet.octopart.com:443/AC0603JR-7W68RL-Yageo-datasheet-86786639.pdf?src-supplier=Upverter, ComponentLink3Description=https://datasheet.octopart.com/AC0603JR-7W68RL-Yageo-datasheet-12512238.pdf, ComponentLink3URL=https://datasheet.octopart.com/AC0603JR-7W68RL-Yageo-datasheet-12512238.pdf, ComponentLink4Description=http://sigma.octopart.com:80/rohs_statement/Yageo-company-2.pdf?src-supplier=Compliance+Statements, ComponentLink4URL=http://sigma.octopart.com:80/rohs_statement/Yageo-company-2.pdf?src-supplier=Compliance+Statements, ComponentLink5Description=http://sigma.octopart.com:80/conflict_mineral_statement/Yageo-company-3.pdf?src-supplier=Compliance+Statements, ComponentLink5URL=http://sigma.octopart.com:80/conflict_mineral_statement/Yageo-company-3.pdf?src-supplier=Compliance+Statements, ComponentLink6Description=https://datasheet.octopart.com:443/AC0603JR-7W68RL-Yageo-datasheet-182189377.pdf?src-supplier=IHS, ComponentLink6URL=https://datasheet.octopart.com:443/AC0603JR-7W68RL-Yageo-datasheet-182189377.pdf?src-supplier=IHS, ComponentLink7Description=https://datasheet.octopart.com:443/AC0603JR-7W68RL-Yageo-datasheet-86786639.pdf?src-supplier=Upverter, ComponentLink7URL=https://datasheet.octopart.com:443/AC0603JR-7W68RL-Yageo-datasheet-86786639.pdf?src-supplier=Upverter, ComponentLink8Description=https://datasheet.octopart.com/AC0603JR-7W68RL-Yageo-datasheet-12512238.pdf, ComponentLink8URL=https://datasheet.octopart.com/AC0603JR-7W68RL-Yageo-datasheet-12512238.pdf, ComponentLink9Description=https://datasheet.octopart.com:443/AC0603FR-7W10RL-Yageo-datasheet-182189377.pdf?src-supplier=IHS, ComponentLink9URL=https://datasheet.octopart.com:443/AC0603FR-7W10RL-Yageo-datasheet-182189377.pdf?src-supplier=IHS, ComponentLink10Description=https://datasheet.octopart.com:443/AC0603FR-7W10RL-Yageo-datasheet-86786639.pdf?src-supplier=Upverter, ComponentLink10URL=https://datasheet.octopart.com:443/AC0603FR-7W10RL-Yageo-datasheet-86786639.pdf?src-supplier=Upverter, ComponentLink11Description=https://datasheet.octopart.com/AC0603FR-7W10RL-Yageo-datasheet-12512238.pdf, ComponentLink11URL=https://datasheet.octopart.com/AC0603FR-7W10RL-Yageo-datasheet-12512238.pdf, Composition="Thick Film", Height=450µm, Lifecycle Status=Production, Mount="Surface Mount", Mounting Technology="Surface Mount", Number of Terminals=2, Packaging="Tape & Reel", Power Rating=200mW, Pricing="5000=0,0055 (USD)", Pricing 1="1=0,16, 10=0,016, 50=0,016, 100=0,013, 1000=0,013, 10000=0,009 (USD)", REACH SVHC=Yes, Resistance=10Ω, RoHS=Compliant, Stock=26687, Stock 1=63636, Supplier=DigiKey, Supplier 1=Mouser, Tolerance=1%, Width=800µm, Working Voltage=75V
R9: library part "RESISTOR - GENERIC", "Fixed Resistor, Metal Glaze/thick Film, 0.2W, 10000ohm, 75V, 5% +/-Tol, 100ppm/Cel, Surface Mount, 0603", .Case/Package=0603, .Tolerance=1%, Manufacturer="Yageo Group", Manufacturer Part Number=AC0603JR-7W68RL, Max Operating Temperature=155°C, Min Operating Temperature=-55°C, Power Dissipation=200mW, Supplier Part Number=603-AC0603JR-7W10KL, Temperature Coefficient=100ppm/°C, Voltage Rating=75V, Case/Package=0603, Category="Chip SMD Resistors", China RoHS=Non-Compliant, ComponentLink1Description=https://datasheet.octopart.com:443/AC0603JR-7W68RL-Yageo-datasheet-182189377.pdf?src-supplier=IHS, ComponentLink1URL=https://datasheet.octopart.com:443/AC0603JR-7W68RL-Yageo-datasheet-182189377.pdf?src-supplier=IHS, ComponentLink2Description=https://datasheet.octopart.com:443/AC0603JR-7W68RL-Yageo-datasheet-86786639.pdf?src-supplier=Upverter, ComponentLink2URL=https://datasheet.octopart.com:443/AC0603JR-7W68RL-Yageo-datasheet-86786639.pdf?src-supplier=Upverter, ComponentLink3Description=https://datasheet.octopart.com/AC0603JR-7W68RL-Yageo-datasheet-12512238.pdf, ComponentLink3URL=https://datasheet.octopart.com/AC0603JR-7W68RL-Yageo-datasheet-12512238.pdf, ComponentLink4Description=http://sigma.octopart.com:80/rohs_statement/Yageo-company-2.pdf?src-supplier=Compliance+Statements, ComponentLink4URL=http://sigma.octopart.com:80/rohs_statement/Yageo-company-2.pdf?src-supplier=Compliance+Statements, ComponentLink5Description=http://sigma.octopart.com:80/conflict_mineral_statement/Yageo-company-3.pdf?src-supplier=Compliance+Statements, ComponentLink5URL=http://sigma.octopart.com:80/conflict_mineral_statement/Yageo-company-3.pdf?src-supplier=Compliance+Statements, ComponentLink6Description=https://datasheet.octopart.com:443/AC0603JR-7W68RL-Yageo-datasheet-182189377.pdf?src-supplier=IHS, ComponentLink6URL=https://datasheet.octopart.com:443/AC0603JR-7W68RL-Yageo-datasheet-182189377.pdf?src-supplier=IHS, ComponentLink7Description=https://datasheet.octopart.com:443/AC0603JR-7W68RL-Yageo-datasheet-86786639.pdf?src-supplier=Upverter, ComponentLink7URL=https://datasheet.octopart.com:443/AC0603JR-7W68RL-Yageo-datasheet-86786639.pdf?src-supplier=Upverter, ComponentLink8Description=https://datasheet.octopart.com/AC0603JR-7W68RL-Yageo-datasheet-12512238.pdf, ComponentLink8URL=https://datasheet.octopart.com/AC0603JR-7W68RL-Yageo-datasheet-12512238.pdf, ComponentLink9Description=https://datasheet.octopart.com:443/AC0603FR-7W10RL-Yageo-datasheet-182189377.pdf?src-supplier=IHS, ComponentLink9URL=https://datasheet.octopart.com:443/AC0603FR-7W10RL-Yageo-datasheet-182189377.pdf?src-supplier=IHS, ComponentLink10Description=https://datasheet.octopart.com:443/AC0603FR-7W10RL-Yageo-datasheet-86786639.pdf?src-supplier=Upverter, ComponentLink10URL=https://datasheet.octopart.com:443/AC0603FR-7W10RL-Yageo-datasheet-86786639.pdf?src-supplier=Upverter, ComponentLink11Description=https://datasheet.octopart.com/AC0603FR-7W10RL-Yageo-datasheet-12512238.pdf, ComponentLink11URL=https://datasheet.octopart.com/AC0603FR-7W10RL-Yageo-datasheet-12512238.pdf, ComponentLink12Description=https://datasheet.octopart.com:443/AC0603JR-7W10KL-Yageo-datasheet-182189377.pdf?src-supplier=IHS, ComponentLink12URL=https://datasheet.octopart.com:443/AC0603JR-7W10KL-Yageo-datasheet-182189377.pdf?src-supplier=IHS, ComponentLink13Description=https://datasheet.octopart.com:443/AC0603JR-7W10KL-Yageo-datasheet-86786639.pdf?src-supplier=Upverter, ComponentLink13URL=https://datasheet.octopart.com:443/AC0603JR-7W10KL-Yageo-datasheet-86786639.pdf?src-supplier=Upverter, ComponentLink14Description=https://datasheet.octopart.com:443/AC0603JR-7W10KL-Yageo-datasheet-166720450.pdf?src-supplier=Future+Electronics, ComponentLink14URL=https://datasheet.octopart.com:443/AC0603JR-7W10KL-Yageo-datasheet-166720450.pdf?src-supplier=Future+Electronics, ComponentLink15Description=https://datasheet.octopart.com:443/AC0603JR-7W10KL-Yageo-datasheet-151884373.pdf?src-supplier=Future+Electronics, ComponentLink15URL=https://datasheet.octopart.com:443/AC0603JR-7W10KL-Yageo-datasheet-151884373.pdf?src-supplier=Future+Electronics, ComponentLink16Description=https://datasheet.octopart.com:443/AC0603JR-7W10KL-Yageo-datasheet-137699919.pdf?src-supplier=Future+Electronics, ComponentLink16URL=https://datasheet.octopart.com:443/AC0603JR-7W10KL-Yageo-datasheet-137699919.pdf?src-supplier=Future+Electronics, ComponentLink17Description=https://datasheet.octopart.com/AC0603JR-7W10KL-Yageo-datasheet-12512238.pdf, ComponentLink17URL=https://datasheet.octopart.com/AC0603JR-7W10KL-Yageo-datasheet-12512238.pdf, Composition="Thick Film", Height=450µm, Lifecycle Status=Production, Mount="Surface Mount", Mounting Technology="Surface Mount", Number of Terminals=2, Packaging="Tape & Reel", Power Rating=200mW, Pricing="5000=0,0055 (USD)", Pricing 1="1=0,16, 10=0,016, 50=0,016, 100=0,013, 1000=0,013, 10000=0,009 (USD)", REACH SVHC=Yes, Resistance=10kΩ, RoHS=Compliant, Stock=26687, Stock 1=63636, Supplier=DigiKey, Supplier 1=Mouser, Tolerance=1%, Width=800µm, Working Voltage=75V
SW2: library part CMP-10040-000033-1, "TACT 4.5 X 4.5, 3.8 MM H, 2.5N,", Max Operating Temperature=70°C, Min Operating Temperature=-20°C, Operating Force=250gf, Ratings=IP40, Actuator Type=Standard, Illumination Type=Non-Illuminated, Mechanical Life=100000Cycles, Mount="Surface Mount", Packaging="Tape and Reel", Switch Function=Off-Mom, Switch Travel=0.25mm, Termination="Gull Wing", Throw Configuration=SPST
U1: "Proximity Sensor Time of Flight(TOF) 350cm 2.5V to 3.3V/3V to 3.6VDC 16-Pin OPT LGA EP T/R", Manufacturer=STMicroelectronics, Manufacturer Part Number=VL53L8CXV0GC/1, Max Operating Temperature=85°C, Max Supply Voltage=1.98V, Min Operating Temperature=-30°C, Min Supply Voltage=1.62V, Supplier Part Number=511-VL53L8CXV0GC/1, Supplier Part Number 1=511-VL53L7CXV0GC/1, Category=Sensors, China RoHS=Compliant, Height=1.75mm, Length=6.4mm, Lifecycle Status=Production, Mounting Technology="Surface Mount", Pricing="1=10.39, 10=8.03, 50=7.66, 100=6.65, 1000=5.04, 10000=4.85 (USD)", REACH SVHC=Yes, RoHS=Compliant, Sensing Distance=4m, Stock=7156, Supplier=Mouser, Supplier 1=Mouser

## Via types
v1: diameter 50, hole 28, Top Layer to Bottom Layer, 13 vias
v2: diameter 50, hole 28, Top Layer to Layer 1, 8 vias

## Nets (pads, with @x,y where several pads share a name; then routed paths per layer and width w, separated by ;. In a path a pad name is that pad's centre, name@x,y a point inside that pad or via, vN(x,y) a via of type N, cw(c..) or ccw(c..) an arc to the next point about the centre after c; other vN are vias at no path point)
AVDD: C2.2 C6.2 C7.2 L2.2 U1.B1 U1.B7 | length 734.5
  Top Layer w20: v1(445,2720) C6.2 C6.2@447.5,2616.04 ; C7.2@662.5,2616.04 C7.2 v1(665,2725) ; U1.B1 1059.33,1815.47 1059.33,1730.67 v1(1060,1730) 1145,1645 C2.2 ; U1.B7 1059.33,2025.47 1059.33,2129.33 v1(1060,2130) 1059.57,2130.43 1059.57,2279.57 L2.2
GND: C1.1 C2.1 C6.1 C7.1 C8.1 D1.1 J1.07 J3.06 J3.07 R7.1 R9.1 U1.A2 U1.A6 U1.A7 U1.B4 U1.C1 U1.C6 U1.C7 | length 1285.5
  Top Layer w20: J3.07@134.92,2320.08 J3.07 239.65,2315.16 241.77,2317.28 242.76,2317.28 249.49,2324.02 R9.1 R9.1@244.57,2320.08 ; C8.1 333.54,2556.46 v2(335,2555) ; v2(445,2475) C6.1 ; v2(665,2480) C7.1 ; v2(870,1585) R7.1 ; U1.A2 1022.85,1866.94 1033.12,1866.94 1044.16,1877.98 1044.16,1905.97 U1.B4 ; U1.A7 U1.A6 1030.47,1979.53 1044.16,1965.84 1044.16,1934.97 U1.B4 ; U1.C7 U1.C6 1084.88,1979.53 1073.16,1967.81 1073.16,1934.97 U1.B4 ; C2.1 1145.73,1535.73 1224.27,1535.73 v2(1225,1535) ; v2(1180,1710) 1180,1751.89 U1.C1 1094.14,1831.89 1089.14,1836.89 1083.11,1836.89 1070,1850 1070,1909.13 U1.B4 ; v2(1275,1650) C1.1 ; v2@1725,2220 v2(1725.63,2219.37) D1.1
I2C_RST: J4.04 R7.2 U1.A1 | length 1187.5
  Top Layer w20: J4.04 900.59,1715.16 U1.A1 1017.32,1753.25 1005.51,1741.44 R7.2
INT: J4.03 R3.1 U1.A3 | length 918.7
  Top Layer w20: J4.03 541.71,1815.16 567.07,1840.51 R3.1 865.51,1840.51 915.94,1890.94 U1.A3
IOVDD: C1.2 C8.2 J3.04 L2.1 R1.2 R2.2 R3.2 R4.2 R5.2 R8.1 U1.A4 | length 1711.5
  Top Layer w20: J3.04 130.81,2614.35 259.19,2614.35 C8.2 ; v1(610,2230) 610.26,2230.26 610.26,2314.74 R8.1 ; v1(635,1780) 635.26,1779.74 734.74,1779.74 R3.2 ; v1(690,2080) R4.2 ; v1(730,1895) 735.62,1895 761.1,1920.47 U1.A4 ; v1(770,2280) L2.1 ; R5.2 1330.51,1859.02 1379.53,1810 v1(1555,1810) ; C1.2 v1(1485,1740) ; v1(1335,2120) 1335.51,2119.49 R1.2 ; R2.2 1535,1945 1615,1865 v1(1615,1740)
LPn: J4.02 R4.1 U1.A5 | length 1127.2
  Top Layer w20: J4.02 562.19,1915.16 597.03,1950 987.16,1950 ; R4.1 857.16,2080 987.16,1950 ; U1.A5 987.16,1950
NetD1_2: D1.2 R6.1 | length 266.9
  Top Layer w20: D1.2 1815,2136.38 R6.1
NetJ2_04: J2.04 R6.2 | length 215.3
  Top Layer w20: R6.2 1815.33,1814.82 2029.67,1814.82 J2.04
NetJ6_01: J4.01 R9.2 SW2.1 SW2.2 | length 498.7
  Top Layer w20: J4.01 315.51,2015.16 SW2.1 SW2.2 310.51,2229.84 R9.2
NetR5_1: R5.1 U1.C2 | length 170.1
  Top Layer w20: U1.C2 1100.71,1860.71 1268.78,1860.71 R5.1
NetR8_2: R8.2 SW2.3 SW2.4 | length 369
  Top Layer w20: SW2.3 SW2.4 488.35,2223.35 547.28,2282.28 547.28,2312.8 R8.2
SCL: J1.10 R1.1 U1.C4 | length 1895.9
  Top Layer w20: U1.C4 1171.61,1920.47 1274.49,2023.35 R1.1 1274.49,2714.49 1835,3275 J1.10
SDA: J1.09 R2.1 U1.C3 | length 1936.1
  Top Layer w20: U1.C3 1205.94,1890.94 1260,1945 R2.1 1404.49,2754.49 1825,3175 J1.09
pads on no net: J1.01 J1.02 J1.03 J1.04 J1.05 J1.06 J1.08 J2.01 J2.02 J2.03 J2.05 J2.06 J2.07 J2.08 J3.01 J3.02 J3.03 J3.05 J3.08 J4.05 J4.06 U1.C5

## Polygon pours and split planes (outlines as drawn)
IOVDD on Bottom Layer "Bottom Layer-IOVDD" (solid, pour order 32): 355,2185 455,2185 cw(c455,2110) 530,2110 530,1830 ccw(c654.76,1830) 530,1829.84 530,1615 ccw(c745,1615) 745,1400 1400,1400 ccw(c1400,1680) 1680,1680 1680,1950 1677.59,1950 ccw(c1425.01,1915) 1425,2170 1330,2170 ccw(c1330,2135) 1295,2135.01 1295,1685 cw(c1160.01,1684.99) 1160,1550 945,1550 cw(c945,1680) 815,1680 815,1929.89 815,2290 ccw(c755,2290) 755,2350 370,2350 cw(c370,2415) 305,2415 305,2570.01 305,2595 ccw(c240,2595) 240,2660 120,2660 ccw(c120,2625) 85,2625 85,2610 ccw(c125,2610) 125,2570 195,2570 cw(c195,2550) 215,2550 215,2325 ccw(c355,2325)
AVDD on Bottom Layer "NONET_L-01_P-001" (solid, pour order 13): 400,2745 400,2700 ccw(c425,2700) 425,2675 835,2675 cw(c835,2565) 945,2565 945,1760 ccw(c1020,1760) 1020,1685 1085,1685 ccw(c1085,1765) 1165,1765 1165,2625 ccw(c1010,2625) 1010,2780 435,2780 ccw(c435,2745)
GND on Layer 1 "Layer 1-GND" (solid, pour order 36): 90,2310 ccw(c127.5,2312.5) 127.5,2274.92 ccw(c127.5,2312.5) 130,2275 ccw(c132.5,2312.54) 132.5,2274.92 ccw(c132.5,2312.5) 170,2310 170,2340 cw(c190,2340) 190,2360 260,2360 1535.03,2360 cw(c1535.03,2275.1) 1619.93,2275.1 cw(c1535.04,2275.09) 1595.06,2215.06 1107.43,1727.43 cw(c920.51,1914.32) 920.5,1650 875,1650 ccw(c874.99,1595.01) 820,1595.01 820,1565 ccw(c904.99,1564.99) 905,1480 1240,1480 ccw(c1240,1630) 1390,1630 cw(c1607.28,1630) 1453.64,1783.64 1710.5,2040.5 ccw(c1470.31,2280.7) 1810,2280.71 1810,2360 1810,2615 1810,2835.91 cw(c1904.09,2835.91) 1904.09,2930 2040,2930 ccw(c2040,2965) 2075,2965 2075,2990 ccw(c2045,2990) 2045,3020 1840,3020 ccw(c1840,2890.51) 1710.5,2890.5 1710.5,2685.5 cw(c1640,2685.5) 1640,2615 325,2615 ccw(c324.99,2490.01) 200,2490 200,2470 cw(c185.01,2469.99) 185,2455 125,2455 ccw(c124.99,2420.01) 90,2420

## Silkscreen, mask and mechanical layers (free items; w line width, h text height)
Top Overlay:
  drawing of 92 lines, arcs and shapes, not listed
  text "ST-ToF Shield" at 95,1051.75 h157.48
  text "Tomas Mercado - Vicente Osorio - Felipe Rojas" at 105,889.8 h78.74
  text "\"Information is the resolution of uncertainty.\"" at 685,619.87 h78.74
  text "Claude Shannon" at 1515,550.87 h78.74

## Text inside footprints (layer, text, board x,y; h text height)
U1: Top Overlay "*" at 955,1805 h50; Mechanical 13 "*" at 1026.16,1810.47 h50